# Altium PCB INEMOundergradPCB.PcbDoc
Units mil, origin at the board's own origin, x right, y up, seen from the top; angles counter-clockwise.
Board outline 6000 x 4000 mil, 2 copper layers (Top Layer, Bottom Layer); 18 components, 31 nets, 60 pads, 0 vias.
Unrouted connection lines stored in the file: 28.
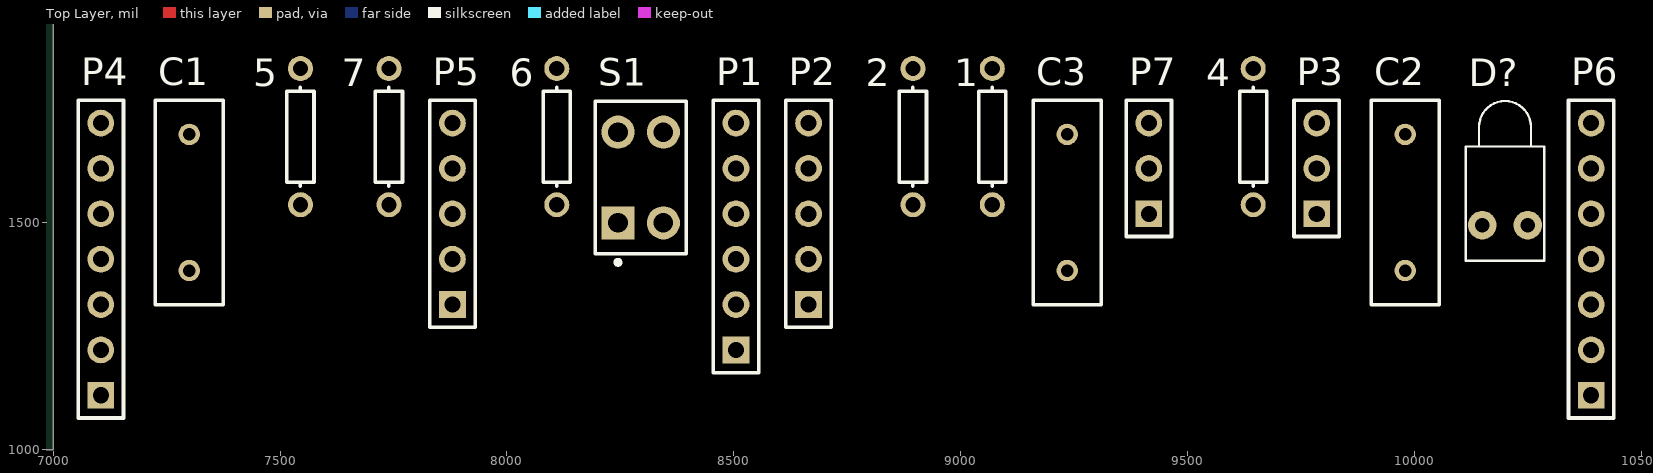
[diagram p0: Top Layer view]
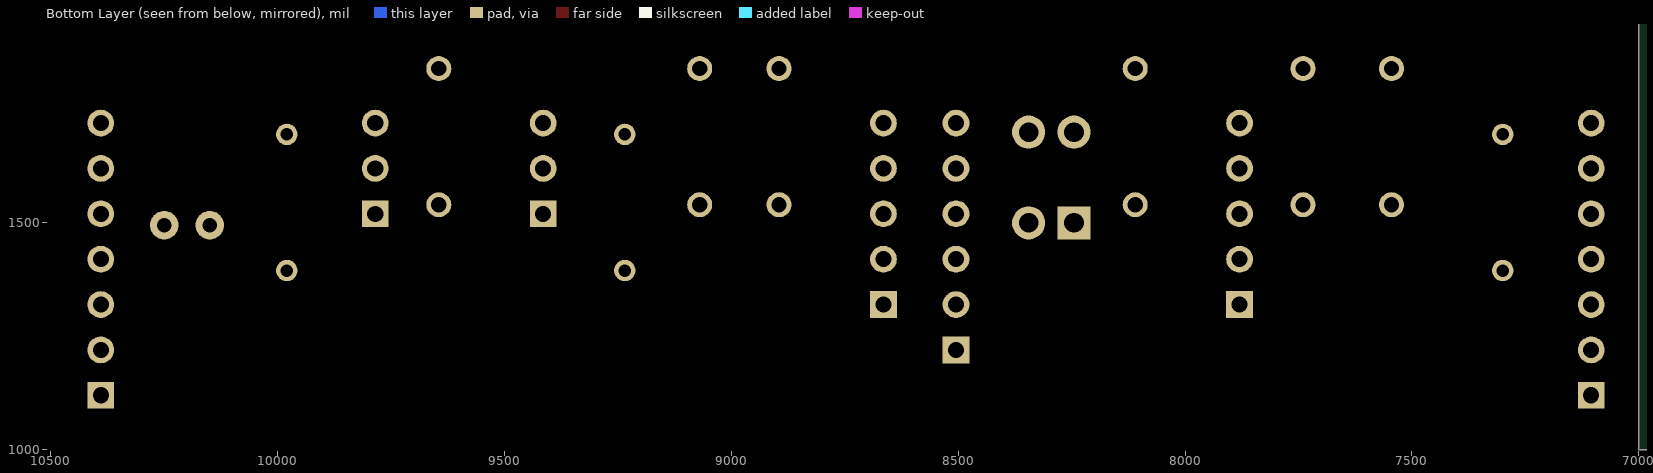
[diagram p1: Bottom Layer view, seen from below]

## Layer stack, top to bottom
Top Solder: solder mask 0.4, Solder Resist, Dk 3.5
Top Layer: signal copper 1.4
Dielectric 1: dielectric 12.6, FR-4, Dk 4.8
Bottom Layer: signal copper 1.4
Bottom Solder: solder mask 0.4, Solder Resist, Dk 3.5

## Board outline
1000,1000 7000,1000 7000,5000 1000,5000

## Design rules (kind name [scope] priority, off if disabled: settings)
Clearance [All] p1: gap=10
PolygonConnect [All] p1: connectstyle=Relief reliefconductorwidth=10 reliefentries=4 polygonreliefangle="90 Angle" airgapwidth=10
RoomDefinition INEMOundergrad [InComponentClass('INEMOundergrad')] p1: confinementstyle=ConfineIn formatcopy=TRUE lockcomponents=FALSE outline 7045,1060 10465,1060 10465,1880 7045,1880
RoutingVias [All] p1: holewidth=28 width=50 viastyle="Through Hole" minholewidth=28 minwidth=50 maxholewidth=28 maxwidth=50
SolderMaskExpansion [All] p1: expansion=4
Width [All] p1: maxlimit=10 minlimit=10 preferedwidth=10
29 further rules are at their usual default settings.

## Components (designator, comment, footprint, x,y, rotation, side; value= is the part's Value field where it differs from the comment)
1 "Boot" AXIAL-0.3 9070,1690 r90 top
2 "switch" AXIAL-0.3 8895,1690 r90 top
4 "LED" AXIAL-0.3 9645,1690 r90 top
5 "pulldown" AXIAL-0.3 7545,1690 r90 top
6 "pullup" AXIAL-0.3 8110,1690 r90 top
7 "pullup" AXIAL-0.3 7740,1690 r90 top
C1 "Cap" RAD-0.3 7300,1545 r90 top
C2 "Cap" RAD-0.3 9980,1545 r90 top
C3 "Cap" RAD-0.3 9235,1545 r90 top
D? "LED1" LED-1 10200,1495 r90 top
P1 "SWD" HDR1X6 8505,1220 r90 top
P2 "OUT3" HDR1X5 8665,1320 r90 top
P3 "powerRegulator" HDR1X3 9785,1520 r90 top
P4 "OUT2" HDR1X7 7105,1120 r90 top
P5 "OUT1" HDR1X5 7880,1320 r90 top
P6 "OUT4" HDR1X7 10390,1120 r90 top
P7 "BOOT" HDR1X3 9415,1520 r90 top
S1 "SW-DPST" DPST-4 8295,1600 r90 top

## Footprints (in the part's own frame and the unit in brackets; to place one, negate y for a bottom-side part, rotate by r counter-clockwise, add the part's x,y. Pads: shape width x height; smd on the part's side, far side on the other; paste and mask are expansions set on the pad)
AXIAL-0.3 [mm] "Axial Device, Thru-Hole; 2 Leads; 0.3 in Pin Spacing"
  round 1.4 hole 0.85: 1(-3.81,0) 2(3.81,0)
  silkscreen extent -2.77,-0.76 2.77,0.76
DPST-4 [mm] "Switch; 4 Leads"
  rect 1.85x1.85 hole 1.1: 1(-2.54,1.27)
  round 1.85 hole 1.1: 2(-2.54,-1.27) 3(2.54,-1.27) 4(2.54,1.27)
  silkscreen extent -4.88,-2.54 4.28,2.54
HDR1X3 [mm] "Connector; Header; 3 Position"
  rect 1.5x1.5 hole 0.9: 1(0,0)
  round 1.5 hole 0.9: 2(2.54,0) 3(5.08,0)
  silkscreen extent -1.27,-1.27 6.35,1.27
HDR1X5 [mm] "Connector; Header; 5 Position"
  rect 1.5x1.5 hole 0.9: 1(0,0)
  round 1.5 hole 0.9: 2(2.54,0) 3(5.08,0) 4(7.62,0) 5(10.16,0)
  silkscreen extent -1.27,-1.27 11.43,1.27
HDR1X6 [mm] "Connector; Header; 6 Position"
  rect 1.5x1.5 hole 0.9: 1(0,0)
  round 1.5 hole 0.9: 2(2.54,0) 3(5.08,0) 4(7.62,0) 5(10.16,0) 6(12.7,0)
  silkscreen extent -1.27,-1.27 13.97,1.27
HDR1X7 [mm] "Connector; Header; 7 Position"
  rect 1.5x1.5 hole 0.9: 1(0,0)
  round 1.5 hole 0.9: 2(2.54,0) 3(5.08,0) 4(7.62,0) 5(10.16,0) 6(12.7,0) 7(15.24,0)
  silkscreen extent -1.27,-1.27 16.51,1.27
LED-1 [mm] "LED; 2 Leads"
  round 1.6 hole 0.8: 1(0,1.27) 2(0,-1.27)
  silkscreen extent -2,-2.2 6.95,2.2
RAD-0.3 [mm] "Radial Cap, Thru-Hole; 2 Leads; 0.3 in Pin Spacing"
  round 1.2 hole 0.7: 1(-3.81,0) 2(3.81,0)
  silkscreen extent -5.71,-1.91 5.71,1.91

## Part data
1 2 4 5 6 7: library part Res1, "Resistor"
C1 C2 C3: "Capacitor"
D?: "Typical RED GaAs LED"
P1: library part "Header 6", "Header, 6-Pin"
P2 P5: library part "Header 5", "Header, 5-Pin"
P3 P7: library part "Header 3", "Header, 3-Pin"
P4 P6: library part "Header 7", "Header, 7-Pin"
S1: "Double-Pole, Single-Throw Switch"

## Nets (pads, with @x,y where several pads share a name; then routed paths per layer and width w, separated by ;. In a path a pad name is that pad's centre, name@x,y a point inside that pad or via, vN(x,y) a via of type N, cw(c..) or ccw(c..) an arc to the next point about the centre after c; other vN are vias at no path point)
Net1_1: 1.1
Net1_2: 1.2 P7.2
Net2_1: 2.1 C1.2 P1.1 S1.2 S1.4
Net2_2: 2.2 P5.5 P7.3
Net4_1: 4.1 D?.1
Net4_2: 4.2 C3.1 P2.3 P3.3
Net5_1: 5.1 P1.3
Net5_2: 5.2 C1.1 C2.2 C3.2 D?.2 P1.6 P2.2 P3.2 P7.1 S1.1 S1.3
Net6_2: 6.2 7.1 P1.2 P6.2
Net7_2: 7.2 P1.5
NetC2_1: C2.1 P2.1 P3.1
"NetComponent 1_4": P5.4
"NetComponent 1_5": P5.3
"NetComponent 1_6": P5.2
"NetComponent 1_7": P5.1
"NetComponent 1_8": P4.7
"NetComponent 1_9": P4.6
"NetComponent 1_10": P4.5
"NetComponent 1_11": P4.4
"NetComponent 1_12": P4.3
"NetComponent 1_13": P4.2
"NetComponent 1_14": P4.1
"NetComponent 1_16": P2.5
"NetComponent 1_18": P2.4
"NetComponent 1_19": P1.4
"NetComponent 1_22": P6.7
"NetComponent 1_23": P6.6
"NetComponent 1_24": P6.5
"NetComponent 1_25": P6.4
"NetComponent 1_26": P6.3
"NetComponent 1_28": P6.1
pads on no net: 6.1